# Altium PCB PCB1.PcbDoc
Units mil, origin at the board's own origin, x right, y up, seen from the top; angles counter-clockwise.
Board outline 2940.03 x 2225.03 mil, 2 copper layers (Top Layer, Bottom Layer); 28 components, 22 nets, 110 pads, 0 vias.
Unrouted connection lines stored in the file: 30.
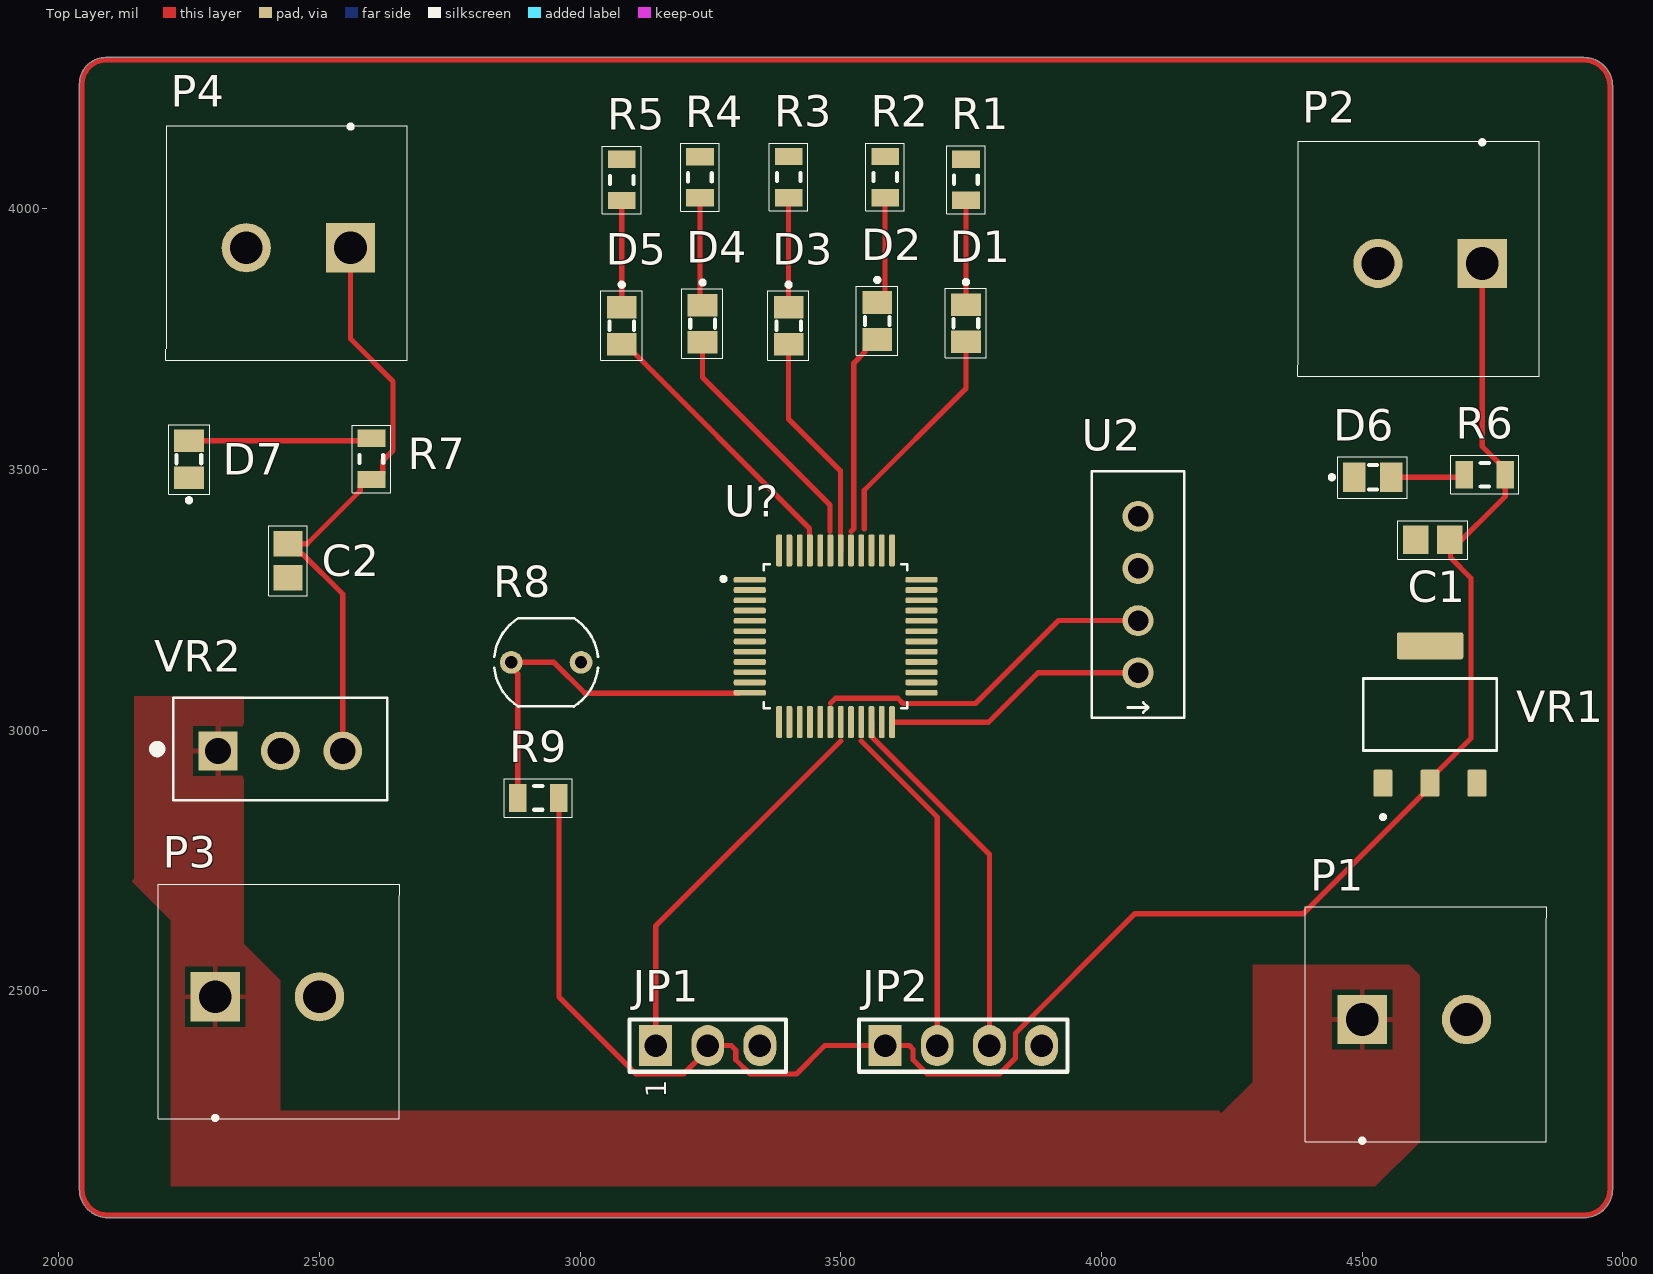
[diagram p0: Top Layer view]
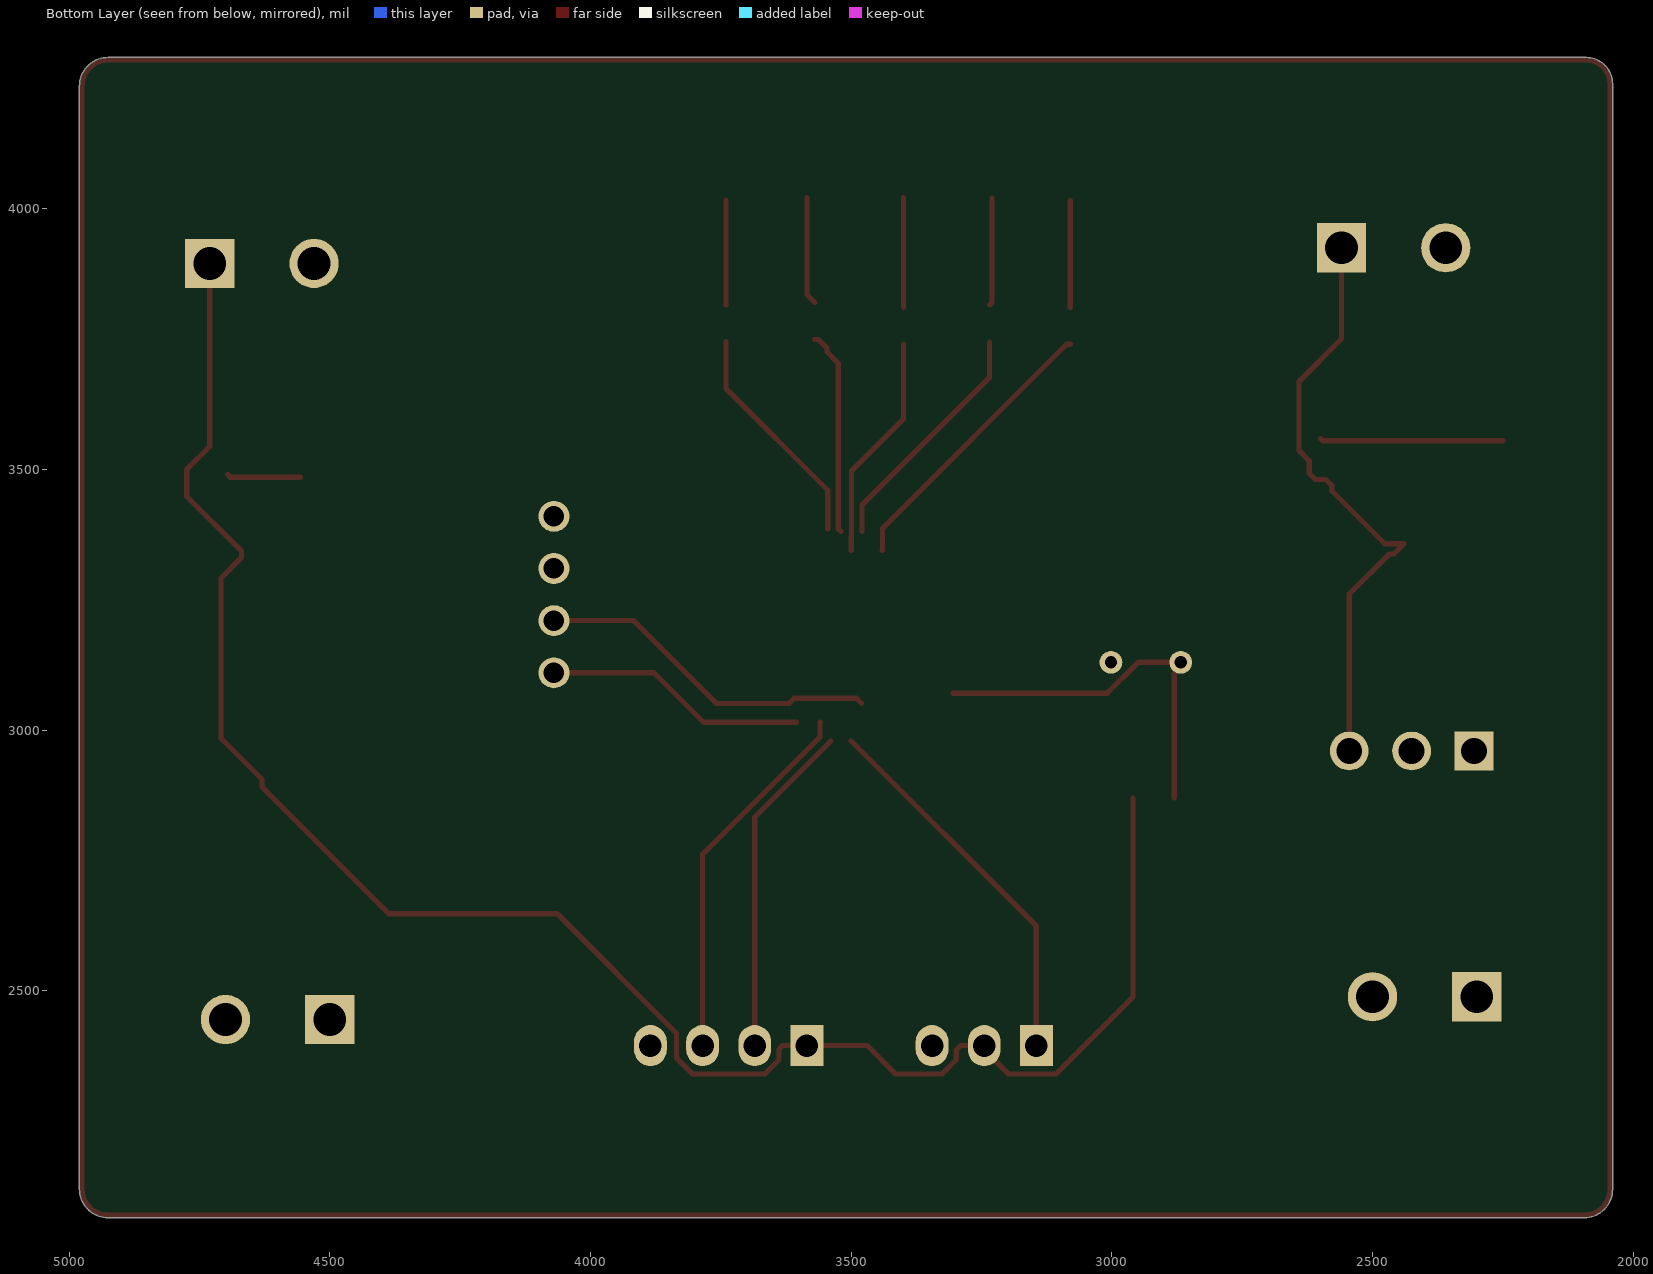
[diagram p1: Bottom Layer view, seen from below]
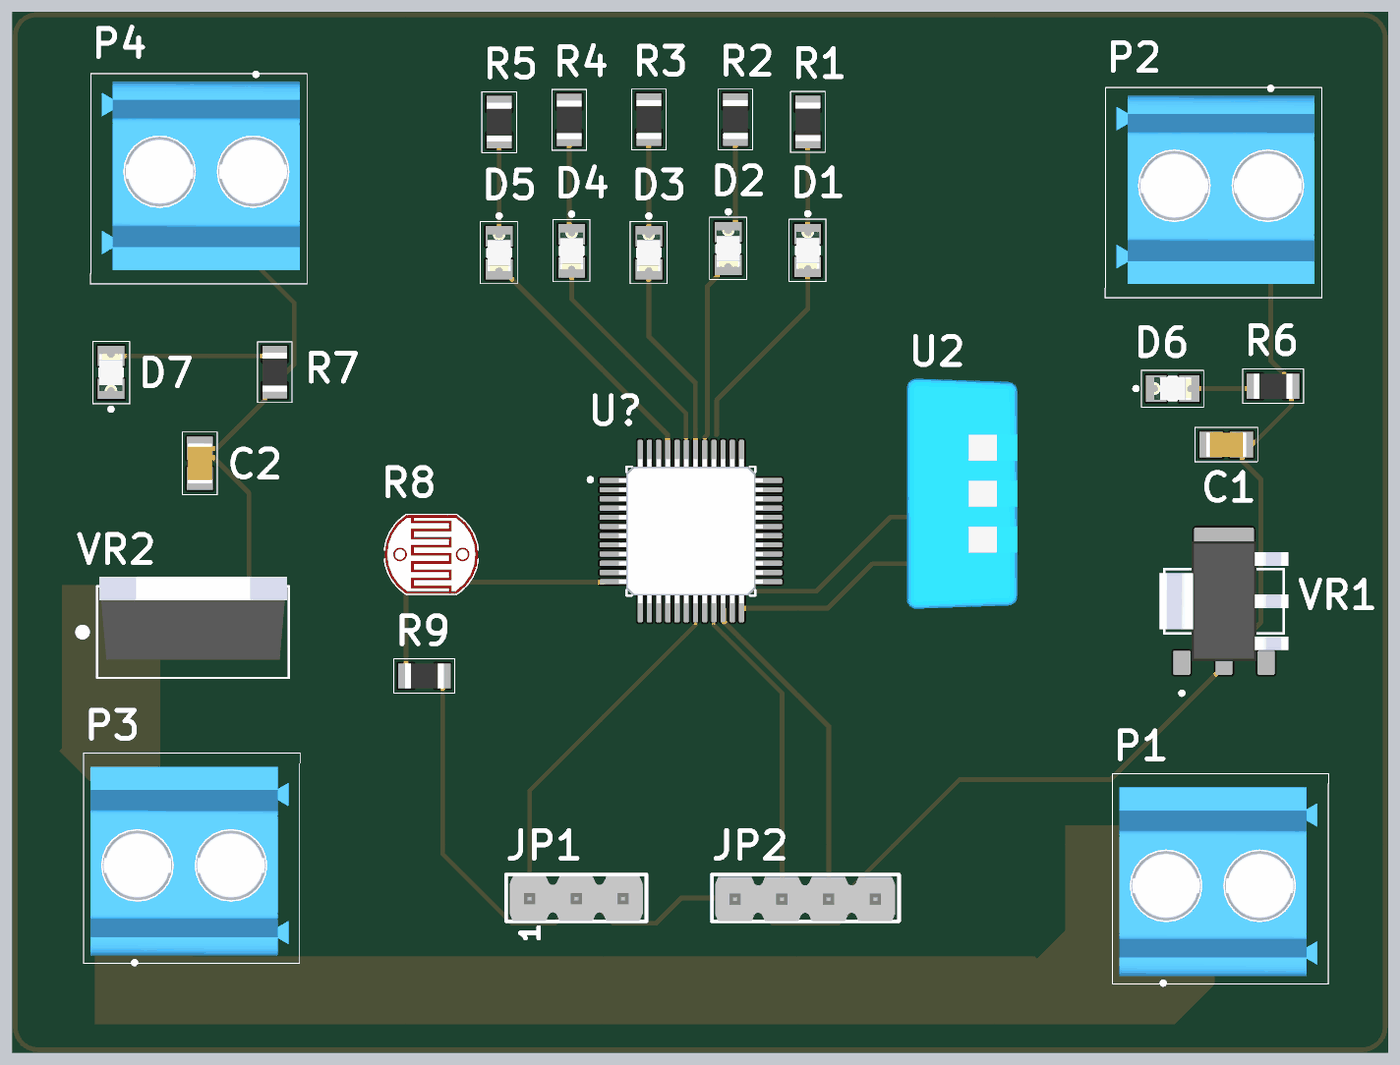
[diagram p2: 3D render of the assembled board from above, using the file's embedded part models]

## Layer stack, top to bottom
Top Solder: solder mask 0.4, Solder Resist, Dk 3.5
Top Layer: signal copper 1.4
Dielectric 1: dielectric 12.6, FR-4, Dk 4.8
Bottom Layer: signal copper 1.4
Bottom Solder: solder mask 0.4, Solder Resist, Dk 3.5

## Board outline
2039.98,2119.35 2039.98,4212.57 2039.98,4239.44 cw(c2090.56,4239.44) 2090.56,4290.02 4925,4290.02 cw(c4925,4235) 4980.02,4235 4980.02,2120 cw(c4925,2120) 4925,2064.99 2094.32,2064.99 cw(c2094.35,2119.35)

## Design rules (kind name [scope] priority, off if disabled: settings)
Clearance [All] p1: gap=10 ignorepadtopadclearanceinfootprint=FALSE
PolygonConnect [All] p1: connectstyle=Relief reliefconductorwidth=10 reliefentries=4 polygonreliefangle="90 Angle" airgapwidth=10
RoutingVias [All] p1: holewidth=28 width=50 viastyle="Through Hole" minholewidth=28 minwidth=50 maxholewidth=28 maxwidth=50
SolderMaskExpansion [All] p1: expansion=4 istentingtop=FALSE
SupplyNets "Schematic Supply Nets_14" [InNet('GND')] p1: voltage=0.000
SupplyNets "Schematic Supply Nets_13" [InNet('B11E')] p2: voltage=0.000
SupplyNets "Schematic Supply Nets_12" [InNet('B1')] p3: voltage=0.000
SupplyNets "Schematic Supply Nets_11" [InNet('5V')] p4: voltage=0.000
SupplyNets "Schematic Supply Nets_10" [InNet('B8')] p5: voltage=0.000
SupplyNets "Schematic Supply Nets_9" [InNet('3.3V')] p6: voltage=0.000
SupplyNets "Schematic Supply Nets_8" [InNet('A2')] p7: voltage=0.000
SupplyNets "Schematic Supply Nets_7" [InNet('VIN')] p8: voltage=0.000
SupplyNets "Schematic Supply Nets_6" [InNet('B6')] p9: voltage=0.000
SupplyNets "Schematic Supply Nets_5" [InNet('B0')] p10: voltage=0.000
SupplyNets "Schematic Supply Nets_4" [InNet('B10T')] p11: voltage=0.000
SupplyNets "Schematic Supply Nets_3" [InNet('B5')] p12: voltage=0.000
SupplyNets "Schematic Supply Nets_2" [InNet('B7')] p13: voltage=0.000
SupplyNets "Schematic Supply Nets_1" [InNet('B4')] p14: voltage=0.000
SupplyNets "Schematic Supply Nets" [InNet('3V3')] p15: voltage=0.000
Width [All] p1: maxlimit=10 minlimit=10 preferedwidth=10
30 further rules are at their usual default settings.

## Components (designator, comment, footprint, x,y, rotation, side; value= is the part's Value field where it differs from the comment)
C1 "10uF" Cap_0805 4635,3365 r180 top
C2 "10uF" Cap_0805 2440,3325 r270 top
D1 "LED_R" LED_0805 3738,3866.43 r270 top
D2 "LED_R" LED_0805 3568,3870.57 r270 top
D3 "LED_R" LED_0805 3398,3861.43 r270 top
D4 "LED_G" LED_0805 3233,3865.57 r270 top
D5 "LED_W" LED_0805 3078,3861.43 r270 top
D6 "LED_G" LED_0805 4434.43,3483 r0 top
D7 "LED_G" LED_0805 2252,3433.57 r90 top
JP1 "servo conn" "HDR 1~3 2.54mm" 3145,2395 r90 top
JP2 "US conn" "HDR Male1~4 2.54mm" 3585,2395 r90 top
P1 "5,08mm" Screw_terminal_block_5.0 4332,2206 r0 top
P2 "5,08mm" Screw_terminal_block_5.0 4898,4134 r180 top
P3 "5,08mm" Screw_terminal_block_5.0 2132.32,2249.74 r0 top
P4 "5,08mm" Screw_terminal_block_5.0 2728,4164 r180 top
R1 "220" Res_0805 3740,4055.63 r270 top
R2 "220" Res_0805 3585,4060.63 r270 top
R3 "220" Res_0805 3400,4060.63 r270 top
R4 "220" Res_0805 3230,4060 r270 top
R5 "220" Res_0805 3080,4055 r270 top
R6 "1K" Res_0805 4735,3490 r0 top
R7 "1K" Res_0805 2600,3520 r270 top
R8 "GL5549 Photoresistor" "GL5549 Photoresistor" 2935,3135 r180 top
R9 "10K" Res_0805 2920,2870 r180 top
U2 "DHT11" DHT11 4070,3260 r90 top
U? "ST STM32F103C6T6A" STM32F103C6T6A 3480,3190 r0 top
VR1 "AMS1117-3.3" AMS1117-3.3 4605,3030 r90 top
VR2 "7805" TO-220-3 2425.32,2963.74 r0 top

## Footprints (in the part's own frame and the unit in brackets; to place one, negate y for a bottom-side part, rotate by r counter-clockwise, add the part's x,y. Pads: shape width x height; smd on the part's side, far side on the other; paste and mask are expansions set on the pad)
AMS1117-3.3 [mm]
  rrect15% 1.31x0.93 smd: 1(-3.345,1.655) 2(-3.345,-0.635) 3(-3.345,-2.925)
  rrect15% 1.31x3.24 smd: 4(3.345,-0.635)
  silkscreen extent -5.1,-3.89 1.75,2.62, body extent -3.25,-4.13 3.25,2.86, height 1.8
Cap_0805 [mm] "Chip2PinSM127P600-8N"
  rect 1.25x1.4 smd: 1(-0.825,0) 2(0.825,0)
  silkscreen extent -1.7,-0.94 1.7,0.94, body extent -1.1,-0.67 1.1,0.67, height 1.25
DHT11 [mm]
  round 1.508 hole 1: 1(-3.81,0) 2(-1.27,0) 3(1.27,0) 4(3.81,0)
  silkscreen extent -6,-2.25 6,2.25, body extent -6.25,-3 6.25,3, height 16
"GL5549 Photoresistor" [mm]
  round 1.108 hole 0.6: 1(-1.7,0.127) 2(1.7,0.127)
  silkscreen extent -2.53,-2.03 2.53,2.28, body extent -2.54,-2.02 2.54,2.27, height 2.38
"HDR 1~3 2.54mm" [mm]
  rect 2x1.6 hole 1.1: 1(0,0)
  oval 2x1.6 hole 1.1: 2(0,-2.54) 3(0,-5.08)
  silkscreen extent -1.27,-6.35 1.27,1.27, body extent -1.24,-6.15 1.17,1.07, height 8.39
"HDR Male1~4 2.54mm" [mm]
  rect 2x1.6 hole 1.1: 1(0,0)
  oval 2x1.6 hole 1.1: 2(0,-2.54) 3(0,-5.08) 4(0,-7.62)
  silkscreen extent -1.27,-8.89 1.27,1.27, body extent -1.27,-8.68 1.14,1.08, height 8.39
LED_0805 [mm]
  rect 1.1x1.45 smd: 1(3.084,0.051) 2(1.284,0.051)
  silkscreen extent 0.08,-0.97 3.86,1.04, body extent 1.18,-0.57 3.18,0.68, height 0.7
Res_0805 [mm] "Chip2PinSM127P600-8N"
  rect 0.85x1.35 smd: 1(-1,0) 2(1,0)
  silkscreen extent -1.65,-0.94 1.65,0.94, body extent -1.05,-0.67 1.05,0.67, height 0.6
Screw_terminal_block_5.0 [mm]
  rect 2.4x2.4 / inner round 2.4 / far side rect 2.4x2.4 hole 1.6: 1(4.267,6.071)
  round 2.4 hole 1.6: 2(9.347,6.071)
  silkscreen extent 1.5,0.07 13.26,11.56, body extent 1.88,0.56 12.64,10.81, height 14
STM32F103C6T6A [mm]
  rrect50% 1.56x0.28 smd: 1(-3.926,2.496) 2(-3.926,1.996) 3(-3.926,1.496) 4(-3.926,0.996) 5(-3.926,0.496) 6(-3.926,-0.004) 7(-3.926,-0.504) 8(-3.926,-1.004) 9(-3.926,-1.504) 10(-3.926,-2.004) 11(-3.926,-2.504) 12(-3.926,-3.004) 25(4.434,-3.004) 26(4.434,-2.504) 27(4.434,-2.004) 28(4.434,-1.504) 29(4.434,-1.004) 30(4.434,-0.504) 31(4.434,-0.004) 32(4.434,0.496) 33(4.434,0.996) 34(4.434,1.496) 35(4.434,1.996) 36(4.434,2.496)
  rrect50% 0.28x1.56 smd: 13(-2.496,-4.434) 14(-1.996,-4.434) 15(-1.496,-4.434) 16(-0.996,-4.434) 17(-0.496,-4.434) 18(0.004,-4.434) 19(0.504,-4.434) 20(1.004,-4.434) 21(1.504,-4.434) 22(2.004,-4.434) 23(2.504,-4.434) 24(3.004,-4.434) 37(3.004,3.926) 38(2.504,3.926) 39(2.004,3.926) 40(1.504,3.926) 41(1.004,3.926) 42(0.504,3.926) 43(0.004,3.926) 44(-0.496,3.926) 45(-0.996,3.926) 46(-1.496,3.926) 47(-1.996,3.926) 48(-2.496,3.926)
  silkscreen extent -5.31,-3.75 3.75,3.25, body extent -4.25,-4.75 4.75,4.25, height 0.72
TO-220-3 [mm]
  rect 1.89x1.89 / inner round 1.89 / far side rect 1.89x1.89 hole 1.26: 1(-3.04,-0.095)
  round 1.89 hole 1.26: 2(0,-0.095) 3(3.04,-0.095)
  silkscreen extent -6.2,-2.49 5.21,2.49, body extent -5.1,-1.49 5.1,3.01, height 19.22

## Part data
C1 C2: library part cap_0805_10uF, "25V 10uF X5R ±10% 0805 Multilayer Ceramic Capacitors MLCC - SMD/SMT ROHS", Manufacturer="Samsung Electro-Mechanics CL21A226MAYNNNE", Mfr. Part #=CL21A106KAYNNNE, ComponentLink1Description="New link", ComponentLink1URL=https://www.lcsc.com/product-detail/C15850.html?s_z=n_cap%25200805%252010uF, Splr.part#=C15850, Supplier=LCSC
D1 D2 D3: "RED 568nm LED Indication - Discrete 2.2V Radial", Manufacturer=Amicc, Mfr.Part#=A-SP192DGHC-C01-4T, Splr.part#=C19171301, Supplier=LCSC
D4 D6 D7: "Green 568nm LED Indication - Discrete 2.2V Radial", Manufacturer=Amicc, Mfr.Part#=A-SP192DGHC-C01-4T, Splr.part#=C19171301, Supplier=LCSC
D5: "WHITE 568nm LED Indication - Discrete 2.2V Radial", Manufacturer=Amicc, Mfr.Part#=A-SP192DGHC-C01-4T, Splr.part#=C19171301, Supplier=LCSC
JP1: library part "1 x 3 MALE PINHEADERS", "Gold 3A Through Hole Pin Header 2.5mm 3P 6mm -40℃~+105℃ 3mm 2.54mm Brass Black 1 1x3P Through Hole,P=2.54mm Pin Headers ROHS", Manufacturer=JXTCONN, Mfr.Part#=PZ2.54-1X3P-H25, Splr.part#=C42431683, Supplier=LCSC
JP2: library part "1 x 4 MALE PIN HEADERS", "Gold 3A Through Hole Pin Header 2.5mm 6mm 4P -40℃~+105℃ 3mm 2.54mm Black Brass 1 1x4P Through Hole,P=2.54mm Pin Headers ROHS", Manufacturer=hanxia, Mfr.Part#="HX PZ2.54-1x4P ZZ", Splr.part#=C32713270, Supplier=LCSC
P1 P2 P3 P4: library part "screw terminal block 2 port", "1x2P 18A -40℃~+105℃ 250V Green 14~30 Through Hole 5.08mm 2.5 1 2 Through Hole,P=5.08mm Screw Terminal Blocks ROHS", Manufacturer=KANGNEX, Mfr. Part #=WJ500V-5.08-2P, ComponentLink1Description="New link", ComponentLink1URL=https://www.lcsc.com/product-detail/C8465.html, Splr.part#=C8465, Supplier=LCSC
R1 R2 R3 R4 R5 R6 R7 R9: library part Resistor_0805_1K, "125mW Thick Film Resistor 150V ±100ppm/℃ ±1% 1kΩ 0805 Chip Resistor - Surface Mount ROHS", Manufacturer=YAGEO, Mfr. Part #=RC0805FR-071KL, ComponentLink1Description="New link", ComponentLink1URL=https://www.lcsc.com/product-detail/C95781.html?s_z=n_resistor%25200805%25201k, Splr.part#=C95781, Supplier=LCSC
R8: "540nm 100kΩ~200kΩ 10MΩ Through Hole,P=3mm Photoresistors ROHS", Manufacturer="Senba Sensing Tech", Mfr. Part #=GL5549, ComponentLink1Description=Datasheet, ComponentLink1URL=https://www.lcsc.com/datasheet/C125631.pdf, Supplier=*LCSC, supplier Part #=C125631
U2: "±5%RH -20℃~+60℃ 5%RH~95%RH SIP-4 Temperature and Humidity Sensor ROHS", Manufacturer=Aosong, ComponentLink1Description=Datasheet, ComponentLink1URL=https://www.lcsc.com/datasheet/C117051.pdf, Mfr. Part #=DHT11, Supplier=*LCSC, supplier Part #=C117051
U?: "ARM-M3 72MHz LQFP-48(7x7) Microcontrollers (MCU/MPU/SOC) ROHS", Manufacturer=ST, Mfr. Part #=STM32F103C6T6A, ComponentLink1Description=Datasheet, ComponentLink1URL=https://www.lcsc.com/datasheet/C125631.pdf, Supplier=*LCSC, supplier Part #=C8303
VR1: "72dB@(120Hz) 1A Fixed 3.3V Positive 16V SOT-223 Voltage Regulators - Linear, Low Drop Out (LDO) Regulators ROHS", Manufacturer="Advanced Monolithic Systems", ComponentLink1Description="New link", ComponentLink1URL=https://www.lcsc.com/product-detail/C3795.html?s_z=n_7805, Mfr. Part #=AMS1117-3.3, Splr.part#=C6186, Supplieer=LCSC
VR2: "62dB@(120Hz) 1.5A Fixed 5V Positive 25V TO-220 Voltage Regulators - Linear, Low Drop Out (LDO) Regulators ROHS", Manufacturer=ST, Mfr. Part #=L7805CV-DG, ComponentLink1Description="New link", ComponentLink1URL=https://www.lcsc.com/product-detail/C3795.html?s_z=n_7805, Splr.part#=C3795, Supplieer=LCSC

## Nets (pads, with @x,y where several pads share a name; then routed paths per layer and width w, separated by ;. In a path a pad name is that pad's centre, name@x,y a point inside that pad or via, vN(x,y) a via of type N, cw(c..) or ccw(c..) an arc to the next point about the centre after c; other vN are vias at no path point)
3.3V: C1.1 JP1.2 JP2.1 P2.1 R6.2 R9.1 VR1.2 | length 3601.5
  Top Layer w10: R9.1 2959.37,2488.55 3107.29,2340.63 3198.5,2340.63 3245,2387.13 JP1.2 3290,2395 3298.5,2386.5 3298.5,2367.87 3325.74,2340.63 3414.94,2340.63 3469.31,2395 JP2.1 3631.5,2395 3638.5,2387.99 3638.5,2367.87 3665.74,2340.63 3804.26,2340.63 3835,2371.37 3835,2418.63 4064.45,2648.07 4387.25,2648.07 4630,2890.83 VR1.2 4630,2905.79 4708.78,2984.57 4708.78,3291.22 4669.14,3330.86 4669.14,3343.2 4774.37,3448.43 R6.2 4774.37,3499.84 4730,3544.21 P2.1
3V3: U2.1 U?.24 U?.36 U?.48 | length 504.4
  Top Layer w10: 3605,3015 3783.32,3015 3878.32,3110 U2.1
5V: C2.1 P4.1 R7.2 VR2.3 | length 1163.8
  Top Layer w10: VR2.3 2545,3260.9 2468.02,3337.87 2459.61,3337.87 C2.1 2476.85,3357.48 2578.43,3459.06 2578.43,3468.9 2590.16,3480.63 R7.2 2609.84,3480.63 2621.57,3492.36 2621.57,3516.42 2641.57,3536.42 2641.57,3668.8 2560,3750.38 P4.1
A2: R8.2 R9.2 U?.12 | length 726.6
  Top Layer w10: R9.2 2880.63,3108.34 2868.07,3120.9 R8.2 2949.87,3130 3008.97,3070.91 U?.12@3305,3070.91
B0: U2.2 U?.18 | length 663.7
  Top Layer w10: 3480.16,3051.57 3489.73,3061.14 3609.34,3061.14 3619.26,3051.22 3758.56,3051.22 3917.34,3210 U2.2
B1: JP1.1 U?.19 | length 731.3
  Top Layer w10: JP1.1 3145,2624.46 3499.84,2979.3
B4: D1.1 U?.40 | length 439.4
  Top Layer w10: 3545.03,3386.37 3545.03,3459.95 3740,3654.92 D1.1
B5: D2.1 U?.41 | length 393.4
  Top Layer w10: 3519.53,3380.7 3525.03,3386.21 3525.03,3704.17 3546.46,3725.59 3546.46,3732.48 3563.11,3749.13 D2.1
B6: D3.1 U?.42 | length 436.8
  Top Layer w10: D3.1 3400,3596.73 3499.53,3497.2 3499.53,3372.42 3499.84,3372.1 U?.42
B7: D4.1 U?.43 | length 464.7
  Top Layer w10: D4.1 3235,3676.35 3479.53,3431.83 3479.53,3380.7
B8: D5.1 U?.45 | length 548.9
  Top Layer w10: D5.1 3086.89,3740 3439.96,3386.93 3439.96,3345.39 U?.45
B10T: JP2.2 U?.21 | length 644.6
  Top Layer w10: 3539.26,2979.26 3685,2833.51 JP2.2
B11E: JP2.3 U?.22 | length 714.1
  Top Layer w10: U?.22 3559.72,3014.61 3559.72,2987.07 3785,2761.8 JP2.3
GND: C1.2 C2.2 D6.2 D7.2 JP1.3 JP2.4 P1.2 P2.2 P3.2 P4.2 R1.1 R2.1 R3.1 R4.1 R5.1 R8.1 U2.4 U?.23 U?.35 U?.47 VR1.1 VR2.2
NetD1_2: D1.2 R1.2 | length 200.4
  Top Layer w10: D1.2 R1.2
NetD2_2: D2.2 R2.2 | length 207.5
  Top Layer w10: D2.2 3585,3835 R2.2
NetD3_2: D3.2 R3.2 | length 210.4
  Top Layer w10: D3.2 R3.2
NetD4_2: D4.2 R4.2 | length 207.7
  Top Layer w10: R4.2 3230,3820 D4.2
NetD5_2: D5.2 R5.2 | length 204.8
  Top Layer w10: D5.2 R5.2
NetD6_1: D6.1 R6.1 | length 141.8
  Top Layer w10: D6.1 4690.63,3485 R6.1
NetD7_1: D7.1 R7.1 | length 351.8
  Top Layer w10: D7.1 2595.63,3555 R7.1
VIN: P1.1 P3.1 VR1.3 VR2.1
pads on no net: U2.3 U?.1 U?.2 U?.3 U?.4 U?.5 U?.6 U?.7 U?.8 U?.9 U?.10 U?.11 U?.13 U?.14 U?.15 U?.16 U?.17 U?.20 U?.25 U?.26 U?.27 U?.28 U?.29 U?.30 U?.31 U?.32 U?.33 U?.34 U?.37 U?.38 U?.39 U?.44 U?.46 VR1.4
copper on no net: | length 10206.3
  Top Layer w10: 2045,2119.35 ccw(c2094.35,2119.35) 2094.35,2070 4925,2070 ccw(c4925,2120) 4975,2120 4975,4235 ccw(c4925,4235) 4925,4285 2155,4285 2090.56,4285 ccw(c2090.56,4239.44) 2045,4239.44 2045,4212.57 2045,2119.35

## Polygon pours and split planes (outlines as drawn)
VIN on Top Layer "VIN_L01_P001" (solid, pour order 1): 2355,3065 2355,2590 2425,2520 2425,2270 4225,2270 4230,2265 4290,2325 4290,2550 4590,2550 4610,2530 4610,2210 4525,2125 2215,2125 2215,2635 2140,2710 2145,2715 2145,3065 2180,3065

## Text inside footprints (layer, text, board x,y; h text height)
JP1: Top Overlay "1" at 3165,2295 h39.37 r90
JP2: Mechanical 2 "1" at 3605,2295 h39.37 r90